# Altium PCB MK2.PcbDoc (part 2 of 7)
Units mil, origin at the board's own origin, x right, y up, seen from the top; angles counter-clockwise.
Board outline 3950 x 3965 mil, 2 copper layers (Top Layer, Bottom Layer); 19 components, 37 nets, 113 pads, 8 vias.
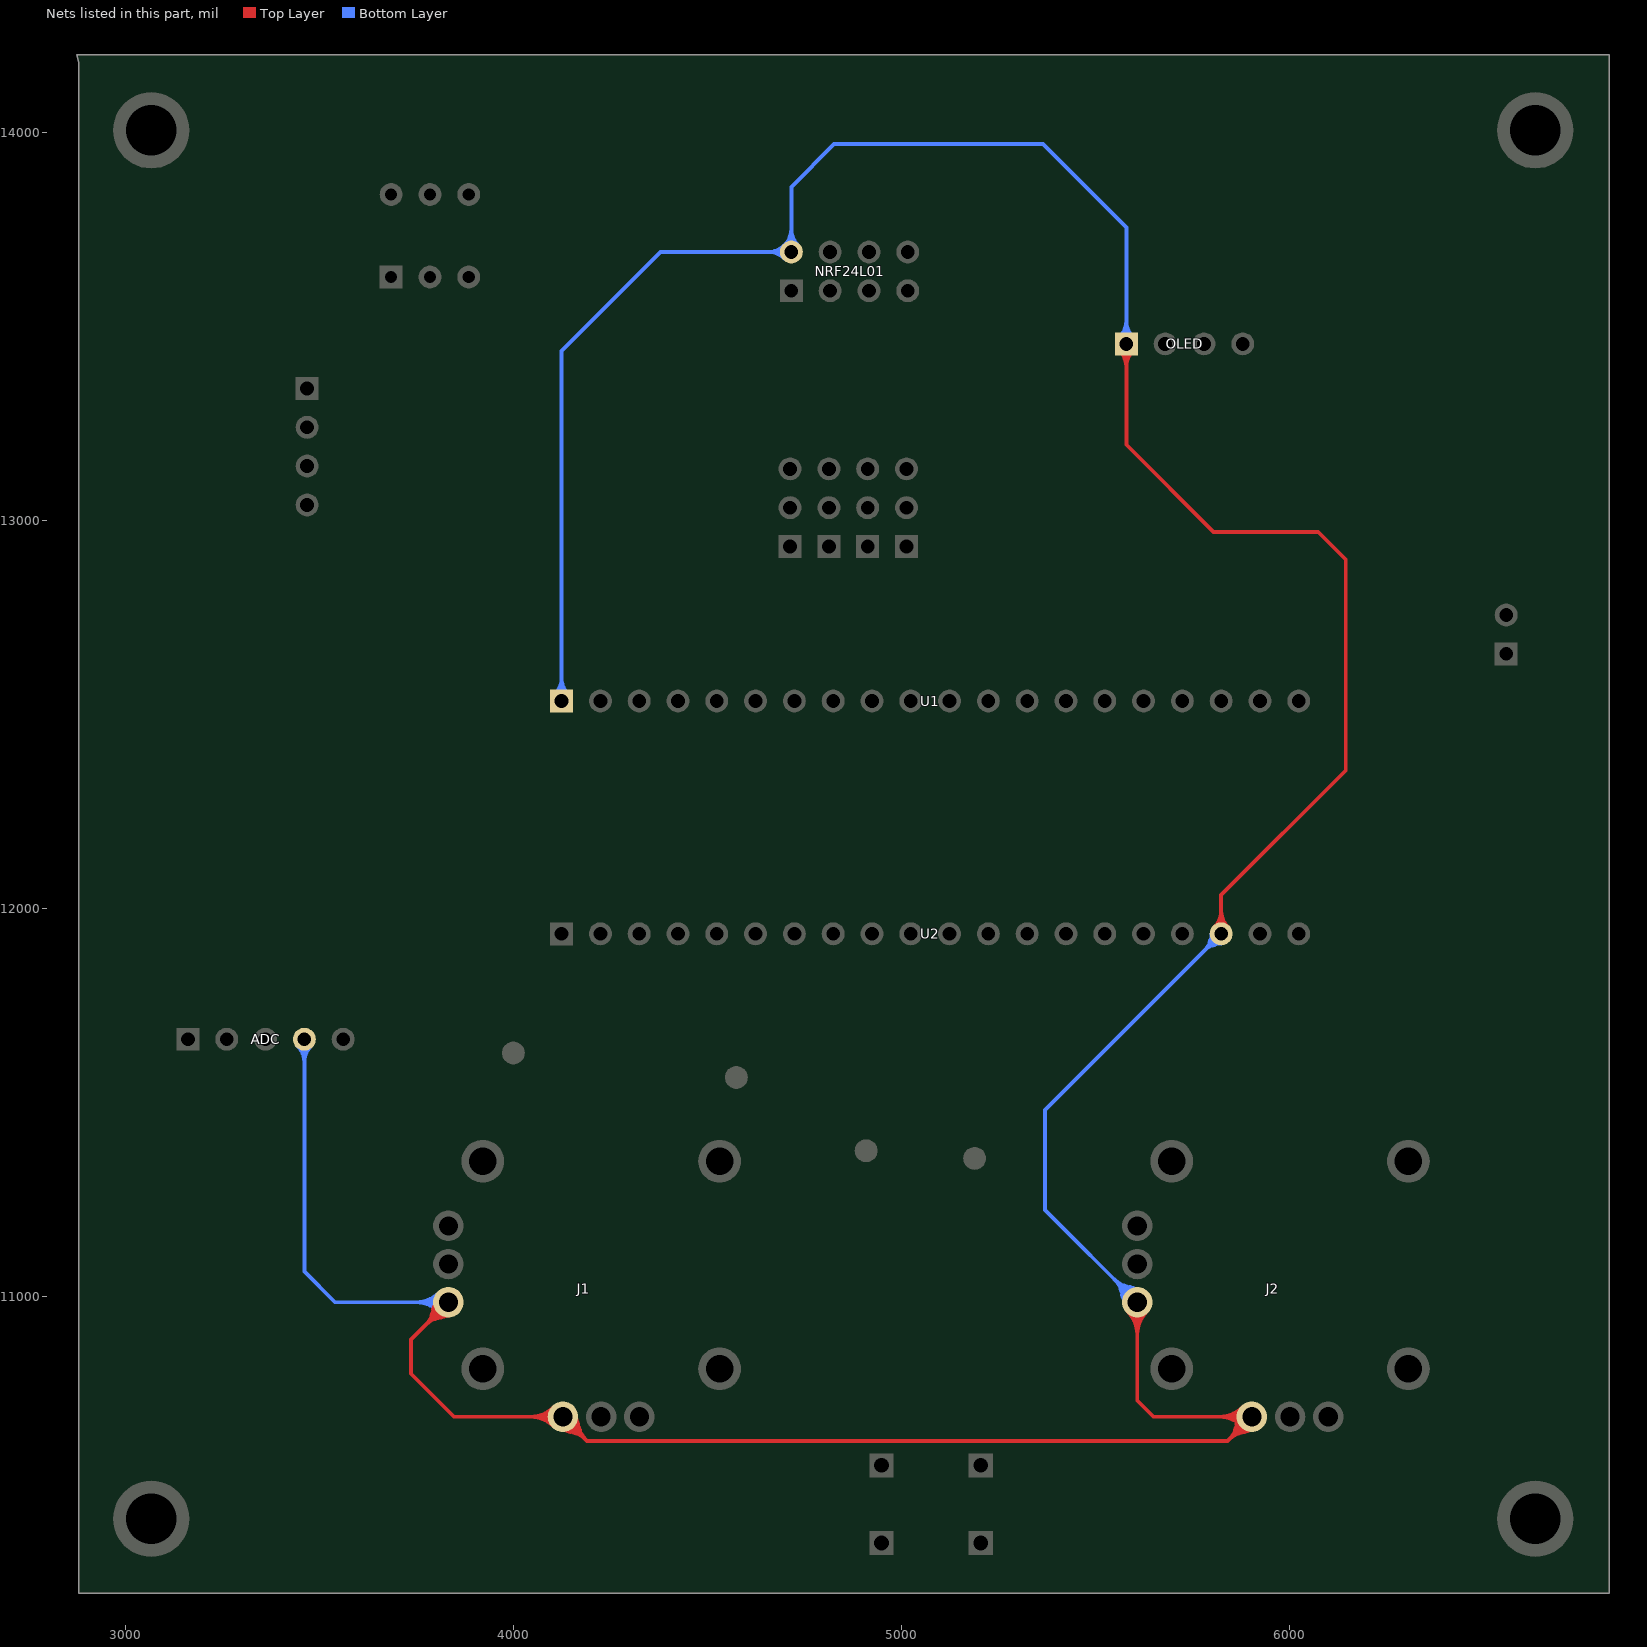
[diagram p2: the nets of this part, all layers, seen from the top]

## Via types
v1: diameter 50, hole 28, Top Layer to Bottom Layer, 8 vias

## Nets (pads, with @x,y where several pads share a name; then routed paths per layer and width w, separated by ;. In a path a pad name is that pad's centre, name@x,y a point inside that pad or via, vN(x,y) a via of type N, cw(c..) or ccw(c..) an arc to the next point about the centre after c; other vN are vias at no path point)
3.3V: ADC.4 J1.3 J1.4 J2.3 J2.4 NRF24L01.2 OLED.1 U1.1 U2.18 | length 45672.4
  Top Layer w10: J1.4@3832.68,10984.92 3736.26,10888.5 3736.26,10800.59 3847.2,10689.65 J1.3@4127.95,10689.65 4190.24,10627.36 5841.26,10627.36 J2.3@5903.54,10689.65 5650.35,10689.65 5608.27,10731.73 J2.4@5608.27,10984.92 ; OLED.1@5562.66,13437.66 cw(c5520.79,13395.79) 5580,13395.79 cw(c5639.21,13395.79) OLED.1@5597.34,13437.66 ; OLED.1@5569.73,13444.73 cw(c5544.93,13419.93) 5580,13419.93 cw(c5615.07,13419.93) OLED.1@5590.27,13444.73 ; OLED.1@5580,13455 5580,13195 5805,12970 6074.72,12970 6145.71,12899.02 6145.71,12355.71 5824.45,12034.45 U2.18@5824.45,11934.45 ; 3774,10926.25 cw(c3832.68,10867.57) J1.4@3832.68,10950.55 ; 3774,10926.25 ccw(c3715.33,10984.92) J1.4@3798.31,10984.92 ; 3774,10926.25 ccw(c3715.33,10984.92) J1.4@3798.31,10984.92 ; 3774,10926.25 cw(c3832.68,10867.57) J1.4@3832.68,10950.55 ; 3774,10926.25 ccw(c3715.33,10984.92) J1.4@3798.31,10984.92 ; 3774,10926.25 cw(c3832.68,10867.57) J1.4@3832.68,10950.55 ; 3774,10926.25 ccw(c3715.33,10984.92) J1.4@3798.31,10984.92 ; 3774,10926.25 cw(c3832.68,10867.57) J1.4@3832.68,10950.55 ; 3774,10926.25 ccw(c3715.33,10984.92) J1.4@3798.31,10984.92 ; 3774,10926.25 cw(c3832.68,10867.57) J1.4@3832.68,10950.55 ; 3774,10926.25 ccw(c3715.33,10984.92) J1.4@3798.31,10984.92 ; 3774,10926.25 cw(c3832.68,10867.57) J1.4@3832.68,10950.55 ; 3789.06,10950.42 cw(c3842.68,10936.05) J1.4@3831.55,10990.44 ; 3789.06,10950.42 cw(c3842.68,10936.05) J1.4@3831.55,10990.44 ; 3789.06,10950.42 cw(c3842.68,10936.05) J1.4@3831.55,10990.44 ; 3789.06,10950.42 cw(c3842.68,10936.05) J1.4@3831.55,10990.44 ; 3789.06,10950.42 cw(c3842.68,10936.05) J1.4@3831.55,10990.44 ; 3789.06,10950.42 cw(c3842.68,10936.05) J1.4@3831.55,10990.44 ; 3789.06,10950.42 cw(c3842.68,10936.05) J1.4@3831.55,10990.44 ; 3789.06,10950.42 cw(c3842.68,10936.05) J1.4@3831.55,10990.44 ; 3789.06,10950.42 cw(c3842.68,10936.05) J1.4@3831.55,10990.44 ; 3789.06,10950.42 cw(c3842.68,10936.05) J1.4@3831.55,10990.44 ; 3789.06,10950.42 cw(c3842.68,10936.05) J1.4@3831.55,10990.44 ; 3789.06,10950.42 cw(c3842.68,10936.05) J1.4@3831.55,10990.44 ; 3789.06,10950.42 cw(c3842.68,10936.05) J1.4@3831.55,10990.44 ; 3789.06,10950.42 cw(c3842.68,10936.05) J1.4@3831.55,10990.44 ; 3789.06,10950.42 cw(c3842.68,10936.05) J1.4@3831.55,10990.44 ; 3791.07,10943.32 cw(c3832.68,10901.72) J1.4@3832.68,10960.55 ; 3791.07,10943.32 ccw(c3749.47,10984.92) J1.4@3808.31,10984.92 ; 3791.07,10943.32 ccw(c3749.47,10984.92) J1.4@3808.31,10984.92 ; 3791.07,10943.32 cw(c3832.68,10901.72) J1.4@3832.68,10960.55 ; 3791.07,10943.32 ccw(c3749.47,10984.92) J1.4@3808.31,10984.92 ; 3791.07,10943.32 cw(c3832.68,10901.72) J1.4@3832.68,10960.55 ; 3791.07,10943.32 ccw(c3749.47,10984.92) J1.4@3808.31,10984.92 ; 3791.07,10943.32 cw(c3832.68,10901.72) J1.4@3832.68,10960.55 ; 3791.07,10943.32 ccw(c3749.47,10984.92) J1.4@3808.31,10984.92 ; 3791.07,10943.32 cw(c3832.68,10901.72) J1.4@3832.68,10960.55 ; 3791.07,10943.32 ccw(c3749.47,10984.92) J1.4@3808.31,10984.92 ; 3791.07,10943.32 cw(c3832.68,10901.72) J1.4@3832.68,10960.55 ; 3793.25,10966.05 cw(c3839.05,10953.78) J1.4@3829.54,11000.23 ; 3793.25,10966.05 cw(c3839.05,10953.78) J1.4@3829.54,11000.23 ; 3793.25,10966.05 cw(c3839.05,10953.78) J1.4@3829.54,11000.23 ; 3793.25,10966.05 cw(c3839.05,10953.78) J1.4@3829.54,11000.23 ; 3793.25,10966.05 cw(c3839.05,10953.78) J1.4@3829.54,11000.23 ; 3793.25,10966.05 cw(c3839.05,10953.78) J1.4@3829.54,11000.23 ; 3793.25,10966.05 cw(c3839.05,10953.78) J1.4@3829.54,11000.23 ; 3793.25,10966.05 cw(c3839.05,10953.78) J1.4@3829.54,11000.23 ; 3793.25,10966.05 cw(c3839.05,10953.78) J1.4@3829.54,11000.23 ; 3793.25,10966.05 cw(c3839.05,10953.78) J1.4@3829.54,11000.23 ; 3793.25,10966.05 cw(c3839.05,10953.78) J1.4@3829.54,11000.23 ; 3793.25,10966.05 cw(c3839.05,10953.78) J1.4@3829.54,11000.23 ; 3793.25,10966.05 cw(c3839.05,10953.78) J1.4@3829.54,11000.23 ; 3793.25,10966.05 cw(c3839.05,10953.78) J1.4@3829.54,11000.23 ; 3793.25,10966.05 cw(c3839.05,10953.78) J1.4@3829.54,11000.23 ; 3798.18,10941.31 ccw(c3783.81,10994.93) J1.4@3838.19,10983.79 ; 3798.18,10941.31 ccw(c3783.81,10994.93) J1.4@3838.19,10983.79 ; 3798.18,10941.31 ccw(c3783.81,10994.93) J1.4@3838.19,10983.79 ; 3798.18,10941.31 ccw(c3783.81,10994.93) J1.4@3838.19,10983.79 ; 3798.18,10941.31 ccw(c3783.81,10994.93) J1.4@3838.19,10983.79 ; 3798.18,10941.31 ccw(c3783.81,10994.93) J1.4@3838.19,10983.79 ; 3798.18,10941.31 ccw(c3783.81,10994.93) J1.4@3838.19,10983.79 ; 3798.18,10941.31 ccw(c3783.81,10994.93) J1.4@3838.19,10983.79 ; 3798.18,10941.31 ccw(c3783.81,10994.93) J1.4@3838.19,10983.79 ; 3798.18,10941.31 ccw(c3783.81,10994.93) J1.4@3838.19,10983.79 ; 3798.18,10941.31 ccw(c3783.81,10994.93) J1.4@3838.19,10983.79 ; 3798.18,10941.31 ccw(c3783.81,10994.93) J1.4@3838.19,10983.79 ; 3798.18,10941.31 ccw(c3783.81,10994.93) J1.4@3838.19,10983.79 ; 3798.18,10941.31 ccw(c3783.81,10994.93) J1.4@3838.19,10983.79 ; 3798.18,10941.31 ccw(c3783.81,10994.93) J1.4@3838.19,10983.79 ; 3800.27,10954.92 cw(c3833.69,10945.97) J1.4@3832.79,10980.55 ; 3800.27,10954.92 cw(c3833.69,10945.97) J1.4@3832.79,10980.55 ; 3800.27,10954.92 cw(c3833.69,10945.97) J1.4@3832.79,10980.55 ; 3800.27,10954.92 cw(c3833.69,10945.97) J1.4@3832.79,10980.55 ; 3800.27,10954.92 cw(c3833.69,10945.97) J1.4@3832.79,10980.55 ; 3800.27,10954.92 cw(c3833.69,10945.97) J1.4@3832.79,10980.55 ; 3800.27,10954.92 cw(c3833.69,10945.97) J1.4@3832.79,10980.55 ; 3800.27,10954.92 cw(c3833.69,10945.97) J1.4@3832.79,10980.55 ; 3800.27,10954.92 cw(c3833.69,10945.97) J1.4@3832.79,10980.55 ; 3800.27,10954.92 cw(c3833.69,10945.97) J1.4@3832.79,10980.55 ; 3800.27,10954.92 cw(c3833.69,10945.97) J1.4@3832.79,10980.55 ; 3800.27,10954.92 cw(c3833.69,10945.97) J1.4@3832.79,10980.55 ; 3800.27,10954.92 cw(c3833.69,10945.97) J1.4@3832.79,10980.55 ; 3800.27,10954.92 cw(c3833.69,10945.97) J1.4@3832.79,10980.55 ; 3800.27,10954.92 cw(c3833.69,10945.97) J1.4@3832.79,10980.55 ; 3802.68,10952.51 ccw(c3793.72,10985.93) J1.4@3828.31,10985.03 ; 3802.68,10952.51 ccw(c3793.72,10985.93) J1.4@3828.31,10985.03 ; 3802.68,10952.51 ccw(c3793.72,10985.93) J1.4@3828.31,10985.03 ; 3802.68,10952.51 ccw(c3793.72,10985.93) J1.4@3828.31,10985.03 ; 3802.68,10952.51 ccw(c3793.72,10985.93) J1.4@3828.31,10985.03 ; 3802.68,10952.51 ccw(c3793.72,10985.93) J1.4@3828.31,10985.03 ; 3802.68,10952.51 ccw(c3793.72,10985.93) J1.4@3828.31,10985.03 ; 3802.68,10952.51 ccw(c3793.72,10985.93) J1.4@3828.31,10985.03 ; 3802.68,10952.51 ccw(c3793.72,10985.93) J1.4@3828.31,10985.03 ; 3802.68,10952.51 ccw(c3793.72,10985.93) J1.4@3828.31,10985.03 ; 3802.68,10952.51 ccw(c3793.72,10985.93) J1.4@3828.31,10985.03 ; 3802.68,10952.51 ccw(c3793.72,10985.93) J1.4@3828.31,10985.03 ; 3802.68,10952.51 ccw(c3793.72,10985.93) J1.4@3828.31,10985.03 ; 3802.68,10952.51 ccw(c3793.72,10985.93) J1.4@3828.31,10985.03 ; 3802.68,10952.51 ccw(c3793.72,10985.93) J1.4@3828.31,10985.03 ; 3813.81,10945.49 ccw(c3801.53,10991.3) J1.4@3847.99,10981.79 ; 3813.81,10945.49 ccw(c3801.53,10991.3) J1.4@3847.99,10981.79 ; 3813.81,10945.49 ccw(c3801.53,10991.3) J1.4@3847.99,10981.79 ; 3813.81,10945.49 ccw(c3801.53,10991.3) J1.4@3847.99,10981.79 ; 3813.81,10945.49 ccw(c3801.53,10991.3) J1.4@3847.99,10981.79 ; 3813.81,10945.49 ccw(c3801.53,10991.3) J1.4@3847.99,10981.79 ; 3813.81,10945.49 ccw(c3801.53,10991.3) J1.4@3847.99,10981.79 ; 3813.81,10945.49 ccw(c3801.53,10991.3) J1.4@3847.99,10981.79 ; 3813.81,10945.49 ccw(c3801.53,10991.3) J1.4@3847.99,10981.79 ; 3813.81,10945.49 ccw(c3801.53,10991.3) J1.4@3847.99,10981.79 ; 3813.81,10945.49 ccw(c3801.53,10991.3) J1.4@3847.99,10981.79 ; 3813.81,10945.49 ccw(c3801.53,10991.3) J1.4@3847.99,10981.79 ; 3813.81,10945.49 ccw(c3801.53,10991.3) J1.4@3847.99,10981.79 ; 3813.81,10945.49 ccw(c3801.53,10991.3) J1.4@3847.99,10981.79 ; 3813.81,10945.49 ccw(c3801.53,10991.3) J1.4@3847.99,10981.79 ; 4044.98,10689.65 cw(c4044.98,10606.67) J1.3@4103.65,10665.34 ; 4044.98,10689.65 ccw(c4044.98,10772.62) J1.3@4103.65,10713.95 ; 4044.98,10689.65 ccw(c4044.98,10772.62) J1.3@4103.65,10713.95 ; 4044.98,10689.65 cw(c4044.98,10606.67) J1.3@4103.65,10665.34 ; 4044.98,10689.65 ccw(c4044.98,10772.62) J1.3@4103.65,10713.95 ; 4044.98,10689.65 cw(c4044.98,10606.67) J1.3@4103.65,10665.34 ; 4044.98,10689.65 ccw(c4044.98,10772.62) J1.3@4103.65,10713.95 ; 4044.98,10689.65 cw(c4044.98,10606.67) J1.3@4103.65,10665.34 ; 4044.98,10689.65 ccw(c4044.98,10772.62) J1.3@4103.65,10713.95 ; 4044.98,10689.65 cw(c4044.98,10606.67) J1.3@4103.65,10665.34 ; 4044.98,10689.65 ccw(c4044.98,10772.62) J1.3@4103.65,10713.95 ; 4044.98,10689.65 cw(c4044.98,10606.67) J1.3@4103.65,10665.34 ; 4069.12,10689.65 cw(c4069.12,10630.81) J1.3@4110.72,10672.41 ; 4069.12,10689.65 ccw(c4069.12,10748.48) J1.3@4110.72,10706.88 ; 4069.12,10689.65 ccw(c4069.12,10748.48) J1.3@4110.72,10706.88 ; 4069.12,10689.65 cw(c4069.12,10630.81) J1.3@4110.72,10672.41 ; 4069.12,10689.65 ccw(c4069.12,10748.48) J1.3@4110.72,10706.88 ; 4069.12,10689.65 cw(c4069.12,10630.81) J1.3@4110.72,10672.41 ; 4069.12,10689.65 ccw(c4069.12,10748.48) J1.3@4110.72,10706.88 ; 4069.12,10689.65 cw(c4069.12,10630.81) J1.3@4110.72,10672.41 ; 4069.12,10689.65 ccw(c4069.12,10748.48) J1.3@4110.72,10706.88 ; 4069.12,10689.65 cw(c4069.12,10630.81) J1.3@4110.72,10672.41 ; 4069.12,10689.65 ccw(c4069.12,10748.48) J1.3@4110.72,10706.88 ; 4069.12,10689.65 cw(c4069.12,10630.81) J1.3@4110.72,10672.41 ; J1.3@4112.64,10686.51 ccw(c4159.1,10696.02) 4146.82,10650.22 ; J1.3@4112.64,10686.51 ccw(c4159.1,10696.02) 4146.82,10650.22 ; J1.3@4112.64,10686.51 ccw(c4159.1,10696.02) 4146.82,10650.22 ; J1.3@4112.64,10686.51 ccw(c4159.1,10696.02) 4146.82,10650.22 ; J1.3@4112.64,10686.51 ccw(c4159.1,10696.02) 4146.82,10650.22 ; J1.3@4112.64,10686.51 ccw(c4159.1,10696.02) 4146.82,10650.22 ; J1.3@4112.64,10686.51 ccw(c4159.1,10696.02) 4146.82,10650.22 ; J1.3@4112.64,10686.51 ccw(c4159.1,10696.02) 4146.82,10650.22 ; J1.3@4112.64,10686.51 ccw(c4159.1,10696.02) 4146.82,10650.22 ; J1.3@4112.64,10686.51 ccw(c4159.1,10696.02) 4146.82,10650.22 ; J1.3@4112.64,10686.51 ccw(c4159.1,10696.02) 4146.82,10650.22 ; J1.3@4112.64,10686.51 ccw(c4159.1,10696.02) 4146.82,10650.22 ; J1.3@4112.64,10686.51 ccw(c4159.1,10696.02) 4146.82,10650.22 ; J1.3@4112.64,10686.51 ccw(c4159.1,10696.02) 4146.82,10650.22 ; J1.3@4112.64,10686.51 ccw(c4159.1,10696.02) 4146.82,10650.22 ; J1.3@4122.44,10688.52 ccw(c4176.82,10699.65) 4162.45,10646.03 ; J1.3@4122.44,10688.52 ccw(c4176.82,10699.65) 4162.45,10646.03 ; J1.3@4122.44,10688.52 ccw(c4176.82,10699.65) 4162.45,10646.03 ; J1.3@4122.44,10688.52 ccw(c4176.82,10699.65) 4162.45,10646.03 ; J1.3@4122.44,10688.52 ccw(c4176.82,10699.65) 4162.45,10646.03 ; J1.3@4122.44,10688.52 ccw(c4176.82,10699.65) 4162.45,10646.03 ; J1.3@4122.44,10688.52 ccw(c4176.82,10699.65) 4162.45,10646.03 ; J1.3@4122.44,10688.52 ccw(c4176.82,10699.65) 4162.45,10646.03 ; J1.3@4122.44,10688.52 ccw(c4176.82,10699.65) 4162.45,10646.03 ; J1.3@4122.44,10688.52 ccw(c4176.82,10699.65) 4162.45,10646.03 ; J1.3@4122.44,10688.52 ccw(c4176.82,10699.65) 4162.45,10646.03 ; J1.3@4122.44,10688.52 ccw(c4176.82,10699.65) 4162.45,10646.03 ; J1.3@4122.44,10688.52 ccw(c4176.82,10699.65) 4162.45,10646.03 ; J1.3@4122.44,10688.52 ccw(c4176.82,10699.65) 4162.45,10646.03 ; J1.3@4122.44,10688.52 ccw(c4176.82,10699.65) 4162.45,10646.03 ; J1.3@4127.84,10685.28 cw(c4126.94,10650.69) 4160.36,10659.64 ; J1.3@4127.84,10685.28 cw(c4126.94,10650.69) 4160.36,10659.64 ; J1.3@4127.84,10685.28 cw(c4126.94,10650.69) 4160.36,10659.64 ; J1.3@4127.84,10685.28 cw(c4126.94,10650.69) 4160.36,10659.64 ; J1.3@4127.84,10685.28 cw(c4126.94,10650.69) 4160.36,10659.64 ; J1.3@4127.84,10685.28 cw(c4126.94,10650.69) 4160.36,10659.64 ; J1.3@4127.84,10685.28 cw(c4126.94,10650.69) 4160.36,10659.64 ; J1.3@4127.84,10685.28 cw(c4126.94,10650.69) 4160.36,10659.64 ; J1.3@4127.84,10685.28 cw(c4126.94,10650.69) 4160.36,10659.64 ; J1.3@4127.84,10685.28 cw(c4126.94,10650.69) 4160.36,10659.64 ; J1.3@4127.84,10685.28 cw(c4126.94,10650.69) 4160.36,10659.64 ; J1.3@4127.84,10685.28 cw(c4126.94,10650.69) 4160.36,10659.64 ; J1.3@4127.84,10685.28 cw(c4126.94,10650.69) 4160.36,10659.64 ; J1.3@4127.84,10685.28 cw(c4126.94,10650.69) 4160.36,10659.64 ; J1.3@4127.84,10685.28 cw(c4126.94,10650.69) 4160.36,10659.64 ; J1.3@4127.95,10655.28 cw(c4127.95,10572.3) 4186.63,10630.97 ; J1.3@4127.95,10655.28 cw(c4127.95,10572.3) 4186.63,10630.97 ; J1.3@4127.95,10655.28 cw(c4127.95,10572.3) 4186.63,10630.97 ; J1.3@4127.95,10655.28 cw(c4127.95,10572.3) 4186.63,10630.97 ; J1.3@4127.95,10655.28 cw(c4127.95,10572.3) 4186.63,10630.97 ; J1.3@4127.95,10655.28 cw(c4127.95,10572.3) 4186.63,10630.97 ; J1.3@4127.95,10665.28 cw(c4127.95,10606.44) 4169.56,10648.04 ; J1.3@4127.95,10665.28 cw(c4127.95,10606.44) 4169.56,10648.04 ; J1.3@4127.95,10665.28 cw(c4127.95,10606.44) 4169.56,10648.04 ; J1.3@4127.95,10665.28 cw(c4127.95,10606.44) 4169.56,10648.04 ; J1.3@4127.95,10665.28 cw(c4127.95,10606.44) 4169.56,10648.04 ; J1.3@4127.95,10665.28 cw(c4127.95,10606.44) 4169.56,10648.04 ; J1.3@4129.08,10695.16 cw(c4117.95,10640.78) 4171.57,10655.14 ; J1.3@4129.08,10695.16 cw(c4117.95,10640.78) 4171.57,10655.14 ; J1.3@4129.08,10695.16 cw(c4117.95,10640.78) 4171.57,10655.14 ; J1.3@4129.08,10695.16 cw(c4117.95,10640.78) 4171.57,10655.14 ; J1.3@4129.08,10695.16 cw(c4117.95,10640.78) 4171.57,10655.14 ; J1.3@4129.08,10695.16 cw(c4117.95,10640.78) 4171.57,10655.14 ; J1.3@4129.08,10695.16 cw(c4117.95,10640.78) 4171.57,10655.14 ; J1.3@4129.08,10695.16 cw(c4117.95,10640.78) 4171.57,10655.14 ; J1.3@4129.08,10695.16 cw(c4117.95,10640.78) 4171.57,10655.14 ; J1.3@4129.08,10695.16 cw(c4117.95,10640.78) 4171.57,10655.14 ; J1.3@4129.08,10695.16 cw(c4117.95,10640.78) 4171.57,10655.14 ; J1.3@4129.08,10695.16 cw(c4117.95,10640.78) 4171.57,10655.14 ; J1.3@4129.08,10695.16 cw(c4117.95,10640.78) 4171.57,10655.14 ; J1.3@4129.08,10695.16 cw(c4117.95,10640.78) 4171.57,10655.14 ; J1.3@4129.08,10695.16 cw(c4117.95,10640.78) 4171.57,10655.14 ; J1.3@4131.09,10704.96 cw(c4121.58,10658.5) 4167.38,10670.78 ; J1.3@4131.09,10704.96 cw(c4121.58,10658.5) 4167.38,10670.78 ; J1.3@4131.09,10704.96 cw(c4121.58,10658.5) 4167.38,10670.78 ; J1.3@4131.09,10704.96 cw(c4121.58,10658.5) 4167.38,10670.78 ; J1.3@4131.09,10704.96 cw(c4121.58,10658.5) 4167.38,10670.78 ; J1.3@4131.09,10704.96 cw(c4121.58,10658.5) 4167.38,10670.78 ; J1.3@4131.09,10704.96 cw(c4121.58,10658.5) 4167.38,10670.78 ; J1.3@4131.09,10704.96 cw(c4121.58,10658.5) 4167.38,10670.78 ; J1.3@4131.09,10704.96 cw(c4121.58,10658.5) 4167.38,10670.78 ; J1.3@4131.09,10704.96 cw(c4121.58,10658.5) 4167.38,10670.78 ; J1.3@4131.09,10704.96 cw(c4121.58,10658.5) 4167.38,10670.78 ; J1.3@4131.09,10704.96 cw(c4121.58,10658.5) 4167.38,10670.78 ; J1.3@4131.09,10704.96 cw(c4121.58,10658.5) 4167.38,10670.78 ; J1.3@4131.09,10704.96 cw(c4121.58,10658.5) 4167.38,10670.78 ; J1.3@4131.09,10704.96 cw(c4121.58,10658.5) 4167.38,10670.78 ; J1.3@4132.32,10689.76 ccw(c4166.91,10690.66) 4157.95,10657.24 ; J1.3@4132.32,10689.76 ccw(c4166.91,10690.66) 4157.95,10657.24 ; J1.3@4132.32,10689.76 ccw(c4166.91,10690.66) 4157.95,10657.24 ; J1.3@4132.32,10689.76 ccw(c4166.91,10690.66) 4157.95,10657.24 ; J1.3@4132.32,10689.76 ccw(c4166.91,10690.66) 4157.95,10657.24 ; J1.3@4132.32,10689.76 ccw(c4166.91,10690.66) 4157.95,10657.24 ; J1.3@4132.32,10689.76 ccw(c4166.91,10690.66) 4157.95,10657.24 ; J1.3@4132.32,10689.76 ccw(c4166.91,10690.66) 4157.95,10657.24 ; J1.3@4132.32,10689.76 ccw(c4166.91,10690.66) 4157.95,10657.24 ; J1.3@4132.32,10689.76 ccw(c4166.91,10690.66) 4157.95,10657.24 ; J1.3@4132.32,10689.76 ccw(c4166.91,10690.66) 4157.95,10657.24 ; J1.3@4132.32,10689.76 ccw(c4166.91,10690.66) 4157.95,10657.24 ; J1.3@4132.32,10689.76 ccw(c4166.91,10690.66) 4157.95,10657.24 ; J1.3@4132.32,10689.76 ccw(c4166.91,10690.66) 4157.95,10657.24 ; J1.3@4132.32,10689.76 ccw(c4166.91,10690.66) 4157.95,10657.24 ; J1.3@4152.32,10689.65 ccw(c4211.16,10689.65) 4169.56,10648.04 ; J1.3@4152.32,10689.65 ccw(c4211.16,10689.65) 4169.56,10648.04 ; J1.3@4152.32,10689.65 ccw(c4211.16,10689.65) 4169.56,10648.04 ; J1.3@4152.32,10689.65 ccw(c4211.16,10689.65) 4169.56,10648.04 ; J1.3@4152.32,10689.65 ccw(c4211.16,10689.65) 4169.56,10648.04 ; J1.3@4152.32,10689.65 ccw(c4211.16,10689.65) 4169.56,10648.04 ; J1.3@4162.32,10689.65 ccw(c4245.3,10689.65) 4186.63,10630.97 ; J1.3@4162.32,10689.65 ccw(c4245.3,10689.65) 4186.63,10630.97 ; J1.3@4162.32,10689.65 ccw(c4245.3,10689.65) 4186.63,10630.97 ; J1.3@4162.32,10689.65 ccw(c4245.3,10689.65) 4186.63,10630.97 ; J1.3@4162.32,10689.65 ccw(c4245.3,10689.65) 4186.63,10630.97 ; J1.3@4162.32,10689.65 ccw(c4245.3,10689.65) 4186.63,10630.97 ; J2.4@5583.96,10960.62 cw(c5525.29,10901.94) 5608.27,10901.94 ; J2.4@5583.96,10960.62 cw(c5525.29,10901.94) 5608.27,10901.94 ; J2.4@5583.96,10960.62 cw(c5525.29,10901.94) 5608.27,10901.94 ; J2.4@5583.96,10960.62 cw(c5525.29,10901.94) 5608.27,10901.94 ; J2.4@5583.96,10960.62 cw(c5525.29,10901.94) 5608.27,10901.94 ; J2.4@5583.96,10960.62 cw(c5525.29,10901.94) 5608.27,10901.94 ; J2.4@5591.04,10967.69 cw(c5549.43,10926.09) 5608.27,10926.09 ; J2.4@5591.04,10967.69 cw(c5549.43,10926.09) 5608.27,10926.09 ; J2.4@5591.04,10967.69 cw(c5549.43,10926.09) 5608.27,10926.09 ; J2.4@5591.04,10967.69 cw(c5549.43,10926.09) 5608.27,10926.09 ; J2.4@5591.04,10967.69 cw(c5549.43,10926.09) 5608.27,10926.09 ; J2.4@5591.04,10967.69 cw(c5549.43,10926.09) 5608.27,10926.09 ; 5608.27,10901.94 cw(c5691.24,10901.94) J2.4@5632.57,10960.62 ; 5608.27,10901.94 cw(c5691.24,10901.94) J2.4@5632.57,10960.62 ; 5608.27,10901.94 cw(c5691.24,10901.94) J2.4@5632.57,10960.62 ; 5608.27,10901.94 cw(c5691.24,10901.94) J2.4@5632.57,10960.62 ; 5608.27,10901.94 cw(c5691.24,10901.94) J2.4@5632.57,10960.62 ; 5608.27,10901.94 cw(c5691.24,10901.94) J2.4@5632.57,10960.62 ; 5608.27,10926.09 cw(c5667.1,10926.09) J2.4@5625.5,10967.69 ; 5608.27,10926.09 cw(c5667.1,10926.09) J2.4@5625.5,10967.69 ; 5608.27,10926.09 cw(c5667.1,10926.09) J2.4@5625.5,10967.69 ; 5608.27,10926.09 cw(c5667.1,10926.09) J2.4@5625.5,10967.69 ; 5608.27,10926.09 cw(c5667.1,10926.09) J2.4@5625.5,10967.69 ; 5608.27,10926.09 cw(c5667.1,10926.09) J2.4@5625.5,10967.69 ; U2.18@5807.11,11951.79 ccw(c5765.23,11993.66) 5824.45,11993.66 ; U2.18@5807.11,11951.79 ccw(c5765.23,11993.66) 5824.45,11993.66 ; U2.18@5807.11,11951.79 ccw(c5765.23,11993.66) 5824.45,11993.66 ; U2.18@5807.11,11951.79 ccw(c5765.23,11993.66) 5824.45,11993.66 ; U2.18@5807.11,11951.79 ccw(c5765.23,11993.66) 5824.45,11993.66 ; U2.18@5807.11,11951.79 ccw(c5765.23,11993.66) 5824.45,11993.66 ; U2.18@5814.18,11944.72 ccw(c5789.38,11969.52) 5824.45,11969.52 ; U2.18@5814.18,11944.72 ccw(c5789.38,11969.52) 5824.45,11969.52 ; U2.18@5814.18,11944.72 ccw(c5789.38,11969.52) 5824.45,11969.52 ; U2.18@5814.18,11944.72 ccw(c5789.38,11969.52) 5824.45,11969.52 ; U2.18@5814.18,11944.72 ccw(c5789.38,11969.52) 5824.45,11969.52 ; U2.18@5814.18,11944.72 ccw(c5789.38,11969.52) 5824.45,11969.52 ; 5820.57,10689.65 cw(c5820.57,10606.67) J2.3@5879.24,10665.34 ; 5820.57,10689.65 ccw(c5820.57,10772.62) J2.3@5879.24,10713.95 ; 5820.57,10689.65 ccw(c5820.57,10772.62) J2.3@5879.24,10713.95 ; 5820.57,10689.65 cw(c5820.57,10606.67) J2.3@5879.24,10665.34 ; 5820.57,10689.65 ccw(c5820.57,10772.62) J2.3@5879.24,10713.95 ; 5820.57,10689.65 cw(c5820.57,10606.67) J2.3@5879.24,10665.34 ; 5820.57,10689.65 ccw(c5820.57,10772.62) J2.3@5879.24,10713.95 ; 5820.57,10689.65 cw(c5820.57,10606.67) J2.3@5879.24,10665.34 ; 5820.57,10689.65 ccw(c5820.57,10772.62) J2.3@5879.24,10713.95 ; 5820.57,10689.65 cw(c5820.57,10606.67) J2.3@5879.24,10665.34 ; 5820.57,10689.65 ccw(c5820.57,10772.62) J2.3@5879.24,10713.95 ; 5820.57,10689.65 cw(c5820.57,10606.67) J2.3@5879.24,10665.34 ; 5824.45,11969.52 ccw(c5859.52,11969.52) U2.18@5834.72,11944.72 ; 5824.45,11969.52 ccw(c5859.52,11969.52) U2.18@5834.72,11944.72 ; 5824.45,11969.52 ccw(c5859.52,11969.52) U2.18@5834.72,11944.72 ; 5824.45,11969.52 ccw(c5859.52,11969.52) U2.18@5834.72,11944.72 ; 5824.45,11969.52 ccw(c5859.52,11969.52) U2.18@5834.72,11944.72 ; 5824.45,11969.52 ccw(c5859.52,11969.52) U2.18@5834.72,11944.72 ; 5824.45,11993.66 ccw(c5883.66,11993.66) U2.18@5841.79,11951.79 ; 5824.45,11993.66 ccw(c5883.66,11993.66) U2.18@5841.79,11951.79 ; 5824.45,11993.66 ccw(c5883.66,11993.66) U2.18@5841.79,11951.79 ; 5824.45,11993.66 ccw(c5883.66,11993.66) U2.18@5841.79,11951.79 ; 5824.45,11993.66 ccw(c5883.66,11993.66) U2.18@5841.79,11951.79 ; 5824.45,11993.66 ccw(c5883.66,11993.66) U2.18@5841.79,11951.79 ; 5844.71,10689.65 cw(c5844.71,10630.81) J2.3@5886.31,10672.41 ; 5844.71,10689.65 ccw(c5844.71,10748.48) J2.3@5886.31,10706.88 ; 5844.71,10689.65 ccw(c5844.71,10748.48) J2.3@5886.31,10706.88 ; 5844.71,10689.65 cw(c5844.71,10630.81) J2.3@5886.31,10672.41 ; 5844.71,10689.65 ccw(c5844.71,10748.48) J2.3@5886.31,10706.88 ; 5844.71,10689.65 cw(c5844.71,10630.81) J2.3@5886.31,10672.41 ; 5844.71,10689.65 ccw(c5844.71,10748.48) J2.3@5886.31,10706.88 ; 5844.71,10689.65 cw(c5844.71,10630.81) J2.3@5886.31,10672.41 ; 5844.71,10689.65 ccw(c5844.71,10748.48) J2.3@5886.31,10706.88 ; 5844.71,10689.65 cw(c5844.71,10630.81) J2.3@5886.31,10672.41 ; 5844.71,10689.65 ccw(c5844.71,10748.48) J2.3@5886.31,10706.88 ; 5844.71,10689.65 cw(c5844.71,10630.81) J2.3@5886.31,10672.41 ; 5844.87,10630.97 cw(c5903.54,10572.3) J2.3@5903.54,10655.28 ; 5844.87,10630.97 ccw(c5786.2,10689.65) J2.3@5869.17,10689.65 ; 5844.87,10630.97 ccw(c5786.2,10689.65) J2.3@5869.17,10689.65 ; 5844.87,10630.97 cw(c5903.54,10572.3) J2.3@5903.54,10655.28 ; 5844.87,10630.97 ccw(c5786.2,10689.65) J2.3@5869.17,10689.65 ; 5844.87,10630.97 cw(c5903.54,10572.3) J2.3@5903.54,10655.28 ; 5844.87,10630.97 ccw(c5786.2,10689.65) J2.3@5869.17,10689.65 ; 5844.87,10630.97 cw(c5903.54,10572.3) J2.3@5903.54,10655.28 ; 5844.87,10630.97 ccw(c5786.2,10689.65) J2.3@5869.17,10689.65 ; 5844.87,10630.97 cw(c5903.54,10572.3) J2.3@5903.54,10655.28 ; 5844.87,10630.97 ccw(c5786.2,10689.65) J2.3@5869.17,10689.65 ; 5844.87,10630.97 cw(c5903.54,10572.3) J2.3@5903.54,10655.28 ; 5859.93,10655.14 cw(c5913.55,10640.78) J2.3@5902.41,10695.16 ; 5859.93,10655.14 cw(c5913.55,10640.78) J2.3@5902.41,10695.16 ; 5859.93,10655.14 cw(c5913.55,10640.78) J2.3@5902.41,10695.16 ; 5859.93,10655.14 cw(c5913.55,10640.78) J2.3@5902.41,10695.16 ; 5859.93,10655.14 cw(c5913.55,10640.78) J2.3@5902.41,10695.16 ; 5859.93,10655.14 cw(c5913.55,10640.78) J2.3@5902.41,10695.16 ; 5859.93,10655.14 cw(c5913.55,10640.78) J2.3@5902.41,10695.16 ; 5859.93,10655.14 cw(c5913.55,10640.78) J2.3@5902.41,10695.16 ; 5859.93,10655.14 cw(c5913.55,10640.78) J2.3@5902.41,10695.16 ; 5859.93,10655.14 cw(c5913.55,10640.78) J2.3@5902.41,10695.16 ; 5859.93,10655.14 cw(c5913.55,10640.78) J2.3@5902.41,10695.16 ; 5859.93,10655.14 cw(c5913.55,10640.78) J2.3@5902.41,10695.16 ; 5859.93,10655.14 cw(c5913.55,10640.78) J2.3@5902.41,10695.16 ; 5859.93,10655.14 cw(c5913.55,10640.78) J2.3@5902.41,10695.16 ; 5859.93,10655.14 cw(c5913.55,10640.78) J2.3@5902.41,10695.16 ; 5861.94,10648.04 cw(c5903.54,10606.44) J2.3@5903.54,10665.28 ; 5861.94,10648.04 ccw(c5820.34,10689.65) J2.3@5879.17,10689.65 ; 5861.94,10648.04 ccw(c5820.34,10689.65) J2.3@5879.17,10689.65 ; 5861.94,10648.04 cw(c5903.54,10606.44) J2.3@5903.54,10665.28 ; 5861.94,10648.04 ccw(c5820.34,10689.65) J2.3@5879.17,10689.65 ; 5861.94,10648.04 cw(c5903.54,10606.44) J2.3@5903.54,10665.28 ; 5861.94,10648.04 ccw(c5820.34,10689.65) J2.3@5879.17,10689.65 ; 5861.94,10648.04 cw(c5903.54,10606.44) J2.3@5903.54,10665.28 ; 5861.94,10648.04 ccw(c5820.34,10689.65) J2.3@5879.17,10689.65 ; 5861.94,10648.04 cw(c5903.54,10606.44) J2.3@5903.54,10665.28 ; 5861.94,10648.04 ccw(c5820.34,10689.65) J2.3@5879.17,10689.65 ; 5861.94,10648.04 cw(c5903.54,10606.44) J2.3@5903.54,10665.28 ; 5864.12,10670.78 cw(c5909.92,10658.5) J2.3@5900.41,10704.96 ; 5864.12,10670.78 cw(c5909.92,10658.5) J2.3@5900.41,10704.96 ; 5864.12,10670.78 cw(c5909.92,10658.5) J2.3@5900.41,10704.96 ; 5864.12,10670.78 cw(c5909.92,10658.5) J2.3@5900.41,10704.96 ; 5864.12,10670.78 cw(c5909.92,10658.5) J2.3@5900.41,10704.96 ; 5864.12,10670.78 cw(c5909.92,10658.5) J2.3@5900.41,10704.96 ; 5864.12,10670.78 cw(c5909.92,10658.5) J2.3@5900.41,10704.96 ; 5864.12,10670.78 cw(c5909.92,10658.5) J2.3@5900.41,10704.96 ; 5864.12,10670.78 cw(c5909.92,10658.5) J2.3@5900.41,10704.96 ; 5864.12,10670.78 cw(c5909.92,10658.5) J2.3@5900.41,10704.96 ; 5864.12,10670.78 cw(c5909.92,10658.5) J2.3@5900.41,10704.96 ; 5864.12,10670.78 cw(c5909.92,10658.5) J2.3@5900.41,10704.96 ; 5864.12,10670.78 cw(c5909.92,10658.5) J2.3@5900.41,10704.96 ; 5864.12,10670.78 cw(c5909.92,10658.5) J2.3@5900.41,10704.96 ; 5864.12,10670.78 cw(c5909.92,10658.5) J2.3@5900.41,10704.96 ; 5869.04,10646.03 ccw(c5854.67,10699.65) J2.3@5909.06,10688.52 ; 5869.04,10646.03 ccw(c5854.67,10699.65) J2.3@5909.06,10688.52 ; 5869.04,10646.03 ccw(c5854.67,10699.65) J2.3@5909.06,10688.52 ; 5869.04,10646.03 ccw(c5854.67,10699.65) J2.3@5909.06,10688.52 ; 5869.04,10646.03 ccw(c5854.67,10699.65) J2.3@5909.06,10688.52 ; 5869.04,10646.03 ccw(c5854.67,10699.65) J2.3@5909.06,10688.52 ; 5869.04,10646.03 ccw(c5854.67,10699.65) J2.3@5909.06,10688.52 ; 5869.04,10646.03 ccw(c5854.67,10699.65) J2.3@5909.06,10688.52 ; 5869.04,10646.03 ccw(c5854.67,10699.65) J2.3@5909.06,10688.52 ; 5869.04,10646.03 ccw(c5854.67,10699.65) J2.3@5909.06,10688.52 ; 5869.04,10646.03 ccw(c5854.67,10699.65) J2.3@5909.06,10688.52 ; 5869.04,10646.03 ccw(c5854.67,10699.65) J2.3@5909.06,10688.52 ; 5869.04,10646.03 ccw(c5854.67,10699.65) J2.3@5909.06,10688.52 ; 5869.04,10646.03 ccw(c5854.67,10699.65) J2.3@5909.06,10688.52 ; 5869.04,10646.03 ccw(c5854.67,10699.65) J2.3@5909.06,10688.52 ; 5871.13,10659.64 cw(c5904.55,10650.69) J2.3@5903.66,10685.28 ; 5871.13,10659.64 cw(c5904.55,10650.69) J2.3@5903.66,10685.28 ; 5871.13,10659.64 cw(c5904.55,10650.69) J2.3@5903.66,10685.28 ; 5871.13,10659.64 cw(c5904.55,10650.69) J2.3@5903.66,10685.28 ; 5871.13,10659.64 cw(c5904.55,10650.69) J2.3@5903.66,10685.28 ; 5871.13,10659.64 cw(c5904.55,10650.69) J2.3@5903.66,10685.28 ; 5871.13,10659.64 cw(c5904.55,10650.69) J2.3@5903.66,10685.28 ; 5871.13,10659.64 cw(c5904.55,10650.69) J2.3@5903.66,10685.28 ; 5871.13,10659.64 cw(c5904.55,10650.69) J2.3@5903.66,10685.28 ; 5871.13,10659.64 cw(c5904.55,10650.69) J2.3@5903.66,10685.28 ; 5871.13,10659.64 cw(c5904.55,10650.69) J2.3@5903.66,10685.28 ; 5871.13,10659.64 cw(c5904.55,10650.69) J2.3@5903.66,10685.28 ; 5871.13,10659.64 cw(c5904.55,10650.69) J2.3@5903.66,10685.28 ; 5871.13,10659.64 cw(c5904.55,10650.69) J2.3@5903.66,10685.28 ; 5871.13,10659.64 cw(c5904.55,10650.69) J2.3@5903.66,10685.28 ; 5873.54,10657.24 ccw(c5864.59,10690.66) J2.3@5899.17,10689.76 ; 5873.54,10657.24 ccw(c5864.59,10690.66) J2.3@5899.17,10689.76 ; 5873.54,10657.24 ccw(c5864.59,10690.66) J2.3@5899.17,10689.76 ; 5873.54,10657.24 ccw(c5864.59,10690.66) J2.3@5899.17,10689.76 ; 5873.54,10657.24 ccw(c5864.59,10690.66) J2.3@5899.17,10689.76 ; 5873.54,10657.24 ccw(c5864.59,10690.66) J2.3@5899.17,10689.76 ; 5873.54,10657.24 ccw(c5864.59,10690.66) J2.3@5899.17,10689.76 ; 5873.54,10657.24 ccw(c5864.59,10690.66) J2.3@5899.17,10689.76 ; 5873.54,10657.24 ccw(c5864.59,10690.66) J2.3@5899.17,10689.76 ; 5873.54,10657.24 ccw(c5864.59,10690.66) J2.3@5899.17,10689.76 ; 5873.54,10657.24 ccw(c5864.59,10690.66) J2.3@5899.17,10689.76 ; 5873.54,10657.24 ccw(c5864.59,10690.66) J2.3@5899.17,10689.76 ; 5873.54,10657.24 ccw(c5864.59,10690.66) J2.3@5899.17,10689.76 ; 5873.54,10657.24 ccw(c5864.59,10690.66) J2.3@5899.17,10689.76 ; 5873.54,10657.24 ccw(c5864.59,10690.66) J2.3@5899.17,10689.76 ; 5884.67,10650.22 ccw(c5872.4,10696.02) J2.3@5918.86,10686.51 ; 5884.67,10650.22 ccw(c5872.4,10696.02) J2.3@5918.86,10686.51 ; 5884.67,10650.22 ccw(c5872.4,10696.02) J2.3@5918.86,10686.51 ; 5884.67,10650.22 ccw(c5872.4,10696.02) J2.3@5918.86,10686.51 ; 5884.67,10650.22 ccw(c5872.4,10696.02) J2.3@5918.86,10686.51 ; 5884.67,10650.22 ccw(c5872.4,10696.02) J2.3@5918.86,10686.51 ; 5884.67,10650.22 ccw(c5872.4,10696.02) J2.3@5918.86,10686.51 ; 5884.67,10650.22 ccw(c5872.4,10696.02) J2.3@5918.86,10686.51 ; 5884.67,10650.22 ccw(c5872.4,10696.02) J2.3@5918.86,10686.51 ; 5884.67,10650.22 ccw(c5872.4,10696.02) J2.3@5918.86,10686.51 ; 5884.67,10650.22 ccw(c5872.4,10696.02) J2.3@5918.86,10686.51 ; 5884.67,10650.22 ccw(c5872.4,10696.02) J2.3@5918.86,10686.51 ; 5884.67,10650.22 ccw(c5872.4,10696.02) J2.3@5918.86,10686.51 ; 5884.67,10650.22 ccw(c5872.4,10696.02) J2.3@5918.86,10686.51 ; 5884.67,10650.22 ccw(c5872.4,10696.02) J2.3@5918.86,10686.51
  Bottom Layer w10: ADC.4@3461.46,11662.8 3461.46,11063.58 3540.12,10984.92 J1.4@3832.68,10984.92 ; U1.1@4124.45,12534.45 4124.45,13436.81 4379.57,13691.93 NRF24L01.2@4716.57,13691.93 4716.57,13859.65 4826.81,13969.88 5365.12,13969.88 5580,13755 OLED.1@5580,13455 ; OLED.1@5562.66,13472.34 ccw(c5520.79,13514.21) 5580,13514.21 ccw(c5639.21,13514.21) OLED.1@5597.34,13472.34 ; OLED.1@5569.73,13465.27 ccw(c5544.93,13490.07) 5580,13490.07 ccw(c5615.07,13490.07) OLED.1@5590.27,13465.27 ; J2.4@5608.27,10984.92 5370.12,11223.07 5370.12,11480.12 U2.18@5824.45,11934.45 ; ADC.4@3444.11,11645.45 cw(c3402.24,11603.58) 3461.46,11603.58 ; ADC.4@3444.11,11645.45 cw(c3402.24,11603.58) 3461.46,11603.58 ; ADC.4@3444.11,11645.45 cw(c3402.24,11603.58) 3461.46,11603.58 ; ADC.4@3444.11,11645.45 cw(c3402.24,11603.58) 3461.46,11603.58 ; ADC.4@3444.11,11645.45 cw(c3402.24,11603.58) 3461.46,11603.58 ; ADC.4@3444.11,11645.45 cw(c3402.24,11603.58) 3461.46,11603.58 ; ADC.4@3451.18,11652.52 cw(c3426.38,11627.72) 3461.46,11627.72 ; ADC.4@3451.18,11652.52 cw(c3426.38,11627.72) 3461.46,11627.72 ; ADC.4@3451.18,11652.52 cw(c3426.38,11627.72) 3461.46,11627.72 ; ADC.4@3451.18,11652.52 cw(c3426.38,11627.72) 3461.46,11627.72 ; ADC.4@3451.18,11652.52 cw(c3426.38,11627.72) 3461.46,11627.72 ; ADC.4@3451.18,11652.52 cw(c3426.38,11627.72) 3461.46,11627.72 ; 3461.46,11603.58 cw(c3520.67,11603.58) ADC.4@3478.8,11645.45 ; 3461.46,11603.58 cw(c3520.67,11603.58) ADC.4@3478.8,11645.45 ; 3461.46,11603.58 cw(c3520.67,11603.58) ADC.4@3478.8,11645.45 ; 3461.46,11603.58 cw(c3520.67,11603.58) ADC.4@3478.8,11645.45 ; 3461.46,11603.58 cw(c3520.67,11603.58) ADC.4@3478.8,11645.45 ; 3461.46,11603.58 cw(c3520.67,11603.58) ADC.4@3478.8,11645.45 ; 3461.46,11627.72 cw(c3496.53,11627.72) ADC.4@3471.73,11652.52 ; 3461.46,11627.72 cw(c3496.53,11627.72) ADC.4@3471.73,11652.52 ; 3461.46,11627.72 cw(c3496.53,11627.72) ADC.4@3471.73,11652.52 ; 3461.46,11627.72 cw(c3496.53,11627.72) ADC.4@3471.73,11652.52 ; 3461.46,11627.72 cw(c3496.53,11627.72) ADC.4@3471.73,11652.52 ; 3461.46,11627.72 cw(c3496.53,11627.72) ADC.4@3471.73,11652.52 ; 3749.7,10984.92 cw(c3749.7,10901.94) J1.4@3808.37,10960.62 ; 3749.7,10984.92 ccw(c3749.7,11067.9) J1.4@3808.37,11009.22 ; 3749.7,10984.92 ccw(c3749.7,11067.9) J1.4@3808.37,11009.22 ; 3749.7,10984.92 cw(c3749.7,10901.94) J1.4@3808.37,10960.62 ; 3749.7,10984.92 ccw(c3749.7,11067.9) J1.4@3808.37,11009.22 ; 3749.7,10984.92 cw(c3749.7,10901.94) J1.4@3808.37,10960.62 ; 3749.7,10984.92 ccw(c3749.7,11067.9) J1.4@3808.37,11009.22 ; 3749.7,10984.92 cw(c3749.7,10901.94) J1.4@3808.37,10960.62 ; 3749.7,10984.92 ccw(c3749.7,11067.9) J1.4@3808.37,11009.22 ; 3749.7,10984.92 cw(c3749.7,10901.94) J1.4@3808.37,10960.62 ; 3749.7,10984.92 ccw(c3749.7,11067.9) J1.4@3808.37,11009.22 ; 3749.7,10984.92 cw(c3749.7,10901.94) J1.4@3808.37,10960.62 ; 3773.84,10984.92 cw(c3773.84,10926.09) J1.4@3815.44,10967.69 ; 3773.84,10984.92 ccw(c3773.84,11043.76) J1.4@3815.44,11002.15 ; 3773.84,10984.92 ccw(c3773.84,11043.76) J1.4@3815.44,11002.15 ; 3773.84,10984.92 cw(c3773.84,10926.09) J1.4@3815.44,10967.69 ; 3773.84,10984.92 ccw(c3773.84,11043.76) J1.4@3815.44,11002.15 ; 3773.84,10984.92 cw(c3773.84,10926.09) J1.4@3815.44,10967.69 ; 3773.84,10984.92 ccw(c3773.84,11043.76) J1.4@3815.44,11002.15 ; 3773.84,10984.92 cw(c3773.84,10926.09) J1.4@3815.44,10967.69 ; 3773.84,10984.92 ccw(c3773.84,11043.76) J1.4@3815.44,11002.15 ; 3773.84,10984.92 cw(c3773.84,10926.09) J1.4@3815.44,10967.69 ; 3773.84,10984.92 ccw(c3773.84,11043.76) J1.4@3815.44,11002.15 ; 3773.84,10984.92 cw(c3773.84,10926.09) J1.4@3815.44,10967.69 ; U1.1@4107.11,12551.79 ccw(c4065.23,12593.66) 4124.45,12593.66 ; U1.1@4107.11,12551.79 ccw(c4065.23,12593.66) 4124.45,12593.66 ; U1.1@4107.11,12551.79 ccw(c4065.23,12593.66) 4124.45,12593.66 ; U1.1@4107.11,12551.79 ccw(c4065.23,12593.66) 4124.45,12593.66 ; U1.1@4107.11,12551.79 ccw(c4065.23,12593.66) 4124.45,12593.66 ; U1.1@4107.11,12551.79 ccw(c4065.23,12593.66) 4124.45,12593.66 ; U1.1@4114.18,12544.72 ccw(c4089.38,12569.52) 4124.45,12569.52 ; U1.1@4114.18,12544.72 ccw(c4089.38,12569.52) 4124.45,12569.52 ; U1.1@4114.18,12544.72 ccw(c4089.38,12569.52) 4124.45,12569.52 ; U1.1@4114.18,12544.72 ccw(c4089.38,12569.52) 4124.45,12569.52 ; U1.1@4114.18,12544.72 ccw(c4089.38,12569.52) 4124.45,12569.52 ; U1.1@4114.18,12544.72 ccw(c4089.38,12569.52) 4124.45,12569.52 ; 4124.45,12569.52 ccw(c4159.52,12569.52) U1.1@4134.72,12544.72 ; 4124.45,12569.52 ccw(c4159.52,12569.52) U1.1@4134.72,12544.72 ; 4124.45,12569.52 ccw(c4159.52,12569.52) U1.1@4134.72,12544.72 ; 4124.45,12569.52 ccw(c4159.52,12569.52) U1.1@4134.72,12544.72 ; 4124.45,12569.52 ccw(c4159.52,12569.52) U1.1@4134.72,12544.72 ; 4124.45,12569.52 ccw(c4159.52,12569.52) U1.1@4134.72,12544.72 ; 4124.45,12593.66 ccw(c4183.66,12593.66) U1.1@4141.79,12551.79 ; 4124.45,12593.66 ccw(c4183.66,12593.66) U1.1@4141.79,12551.79 ; 4124.45,12593.66 ccw(c4183.66,12593.66) U1.1@4141.79,12551.79 ; 4124.45,12593.66 ccw(c4183.66,12593.66) U1.1@4141.79,12551.79 ; 4124.45,12593.66 ccw(c4183.66,12593.66) U1.1@4141.79,12551.79 ; 4124.45,12593.66 ccw(c4183.66,12593.66) U1.1@4141.79,12551.79 ; 4657.36,13691.93 cw(c4657.36,13632.71) NRF24L01.2@4699.23,13674.59 ; 4657.36,13691.93 ccw(c4657.36,13751.14) NRF24L01.2@4699.23,13709.27 ; 4657.36,13691.93 ccw(c4657.36,13751.14) NRF24L01.2@4699.23,13709.27 ; 4657.36,13691.93 cw(c4657.36,13632.71) NRF24L01.2@4699.23,13674.59 ; 4657.36,13691.93 ccw(c4657.36,13751.14) NRF24L01.2@4699.23,13709.27 ; 4657.36,13691.93 cw(c4657.36,13632.71) NRF24L01.2@4699.23,13674.59 ; 4657.36,13691.93 ccw(c4657.36,13751.14) NRF24L01.2@4699.23,13709.27 ; 4657.36,13691.93 cw(c4657.36,13632.71) NRF24L01.2@4699.23,13674.59 ; 4657.36,13691.93 ccw(c4657.36,13751.14) NRF24L01.2@4699.23,13709.27 ; 4657.36,13691.93 cw(c4657.36,13632.71) NRF24L01.2@4699.23,13674.59 ; 4657.36,13691.93 ccw(c4657.36,13751.14) NRF24L01.2@4699.23,13709.27 ; 4657.36,13691.93 cw(c4657.36,13632.71) NRF24L01.2@4699.23,13674.59 ; 4681.5,13691.93 cw(c4681.5,13656.86) NRF24L01.2@4706.3,13681.66 ; 4681.5,13691.93 ccw(c4681.5,13727) NRF24L01.2@4706.3,13702.2 ; 4681.5,13691.93 ccw(c4681.5,13727) NRF24L01.2@4706.3,13702.2 ; 4681.5,13691.93 cw(c4681.5,13656.86) NRF24L01.2@4706.3,13681.66 ; 4681.5,13691.93 ccw(c4681.5,13727) NRF24L01.2@4706.3,13702.2 ; 4681.5,13691.93 cw(c4681.5,13656.86) NRF24L01.2@4706.3,13681.66 ; 4681.5,13691.93 ccw(c4681.5,13727) NRF24L01.2@4706.3,13702.2 ; 4681.5,13691.93 cw(c4681.5,13656.86) NRF24L01.2@4706.3,13681.66 ; 4681.5,13691.93 ccw(c4681.5,13727) NRF24L01.2@4706.3,13702.2 ; 4681.5,13691.93 cw(c4681.5,13656.86) NRF24L01.2@4706.3,13681.66 ; 4681.5,13691.93 ccw(c4681.5,13727) NRF24L01.2@4706.3,13702.2 ; 4681.5,13691.93 cw(c4681.5,13656.86) NRF24L01.2@4706.3,13681.66 ; NRF24L01.2@4699.23,13709.27 ccw(c4657.36,13751.14) 4716.57,13751.14 ; NRF24L01.2@4699.23,13709.27 ccw(c4657.36,13751.14) 4716.57,13751.14 ; NRF24L01.2@4699.23,13709.27 ccw(c4657.36,13751.14) 4716.57,13751.14 ; NRF24L01.2@4699.23,13709.27 ccw(c4657.36,13751.14) 4716.57,13751.14 ; NRF24L01.2@4699.23,13709.27 ccw(c4657.36,13751.14) 4716.57,13751.14 ; NRF24L01.2@4699.23,13709.27 ccw(c4657.36,13751.14) 4716.57,13751.14 ; NRF24L01.2@4706.3,13702.2 ccw(c4681.5,13727) 4716.57,13727 ; NRF24L01.2@4706.3,13702.2 ccw(c4681.5,13727) 4716.57,13727 ; NRF24L01.2@4706.3,13702.2 ccw(c4681.5,13727) 4716.57,13727 ; NRF24L01.2@4706.3,13702.2 ccw(c4681.5,13727) 4716.57,13727 ; NRF24L01.2@4706.3,13702.2 ccw(c4681.5,13727) 4716.57,13727 ; NRF24L01.2@4706.3,13702.2 ccw(c4681.5,13727) 4716.57,13727 ; 4716.57,13727 ccw(c4751.65,13727) NRF24L01.2@4726.85,13702.2 ; 4716.57,13727 ccw(c4751.65,13727) NRF24L01.2@4726.85,13702.2 ; 4716.57,13727 ccw(c4751.65,13727) NRF24L01.2@4726.85,13702.2 ; 4716.57,13727 ccw(c4751.65,13727) NRF24L01.2@4726.85,13702.2 ; 4716.57,13727 ccw(c4751.65,13727) NRF24L01.2@4726.85,13702.2 ; 4716.57,13727 ccw(c4751.65,13727) NRF24L01.2@4726.85,13702.2 ; 4716.57,13751.14 ccw(c4775.79,13751.14) NRF24L01.2@4733.92,13709.27 ; 4716.57,13751.14 ccw(c4775.79,13751.14) NRF24L01.2@4733.92,13709.27 ; 4716.57,13751.14 ccw(c4775.79,13751.14) NRF24L01.2@4733.92,13709.27 ; 4716.57,13751.14 ccw(c4775.79,13751.14) NRF24L01.2@4733.92,13709.27 ; 4716.57,13751.14 ccw(c4775.79,13751.14) NRF24L01.2@4733.92,13709.27 ; 4716.57,13751.14 ccw(c4775.79,13751.14) NRF24L01.2@4733.92,13709.27 ; 5549.59,11043.59 cw(c5490.92,10984.92) J2.4@5573.9,10984.92 ; 5549.59,11043.59 ccw(c5608.27,11102.27) J2.4@5608.27,11019.29 ; 5549.59,11043.59 ccw(c5608.27,11102.27) J2.4@5608.27,11019.29 ; 5549.59,11043.59 cw(c5490.92,10984.92) J2.4@5573.9,10984.92 ; 5549.59,11043.59 ccw(c5608.27,11102.27) J2.4@5608.27,11019.29 ; 5549.59,11043.59 cw(c5490.92,10984.92) J2.4@5573.9,10984.92 ; 5549.59,11043.59 ccw(c5608.27,11102.27) J2.4@5608.27,11019.29 ; 5549.59,11043.59 cw(c5490.92,10984.92) J2.4@5573.9,10984.92 ; 5549.59,11043.59 ccw(c5608.27,11102.27) J2.4@5608.27,11019.29 ; 5549.59,11043.59 cw(c5490.92,10984.92) J2.4@5573.9,10984.92 ; 5549.59,11043.59 ccw(c5608.27,11102.27) J2.4@5608.27,11019.29 ; 5549.59,11043.59 cw(c5490.92,10984.92) J2.4@5573.9,10984.92 ; 5564.65,11019.42 ccw(c5618.28,11033.79) J2.4@5607.14,10979.41 ; 5564.65,11019.42 ccw(c5618.28,11033.79) J2.4@5607.14,10979.41 ; 5564.65,11019.42 ccw(c5618.28,11033.79) J2.4@5607.14,10979.41 ; 5564.65,11019.42 ccw(c5618.28,11033.79) J2.4@5607.14,10979.41 ; 5564.65,11019.42 ccw(c5618.28,11033.79) J2.4@5607.14,10979.41 ; 5564.65,11019.42 ccw(c5618.28,11033.79) J2.4@5607.14,10979.41 ; 5564.65,11019.42 ccw(c5618.28,11033.79) J2.4@5607.14,10979.41 ; 5564.65,11019.42 ccw(c5618.28,11033.79) J2.4@5607.14,10979.41 ; 5564.65,11019.42 ccw(c5618.28,11033.79) J2.4@5607.14,10979.41 ; 5564.65,11019.42 ccw(c5618.28,11033.79) J2.4@5607.14,10979.41 ; 5564.65,11019.42 ccw(c5618.28,11033.79) J2.4@5607.14,10979.41 ; 5564.65,11019.42 ccw(c5618.28,11033.79) J2.4@5607.14,10979.41 ; 5564.65,11019.42 ccw(c5618.28,11033.79) J2.4@5607.14,10979.41 ; 5564.65,11019.42 ccw(c5618.28,11033.79) J2.4@5607.14,10979.41 ; 5564.65,11019.42 ccw(c5618.28,11033.79) J2.4@5607.14,10979.41 ; 5566.67,11026.52 cw(c5525.06,10984.92) J2.4@5583.9,10984.92 ; 5566.67,11026.52 ccw(c5608.27,11068.13) J2.4@5608.27,11009.29 ; 5566.67,11026.52 ccw(c5608.27,11068.13) J2.4@5608.27,11009.29 ; 5566.67,11026.52 cw(c5525.06,10984.92) J2.4@5583.9,10984.92 ; 5566.67,11026.52 ccw(c5608.27,11068.13) J2.4@5608.27,11009.29 ; 5566.67,11026.52 cw(c5525.06,10984.92) J2.4@5583.9,10984.92 ; 5566.67,11026.52 ccw(c5608.27,11068.13) J2.4@5608.27,11009.29 ; 5566.67,11026.52 cw(c5525.06,10984.92) J2.4@5583.9,10984.92 ; 5566.67,11026.52 ccw(c5608.27,11068.13) J2.4@5608.27,11009.29 ; 5566.67,11026.52 cw(c5525.06,10984.92) J2.4@5583.9,10984.92 ; 5566.67,11026.52 ccw(c5608.27,11068.13) J2.4@5608.27,11009.29 ; 5566.67,11026.52 cw(c5525.06,10984.92) J2.4@5583.9,10984.92 ; 5568.84,11003.79 ccw(c5614.65,11016.06) J2.4@5605.13,10969.61 ; 5568.84,11003.79 ccw(c5614.65,11016.06) J2.4@5605.13,10969.61 ; 5568.84,11003.79 ccw(c5614.65,11016.06) J2.4@5605.13,10969.61 ; 5568.84,11003.79 ccw(c5614.65,11016.06) J2.4@5605.13,10969.61 ; 5568.84,11003.79 ccw(c5614.65,11016.06) J2.4@5605.13,10969.61 ; 5568.84,11003.79 ccw(c5614.65,11016.06) J2.4@5605.13,10969.61 ; 5568.84,11003.79 ccw(c5614.65,11016.06) J2.4@5605.13,10969.61 ; 5568.84,11003.79 ccw(c5614.65,11016.06) J2.4@5605.13,10969.61 ; 5568.84,11003.79 ccw(c5614.65,11016.06) J2.4@5605.13,10969.61 ; 5568.84,11003.79 ccw(c5614.65,11016.06) J2.4@5605.13,10969.61 ; 5568.84,11003.79 ccw(c5614.65,11016.06) J2.4@5605.13,10969.61 ; 5568.84,11003.79 ccw(c5614.65,11016.06) J2.4@5605.13,10969.61 ; 5568.84,11003.79 ccw(c5614.65,11016.06) J2.4@5605.13,10969.61 ; 5568.84,11003.79 ccw(c5614.65,11016.06) J2.4@5605.13,10969.61 ; 5568.84,11003.79 ccw(c5614.65,11016.06) J2.4@5605.13,10969.61 ; 5573.77,11028.54 cw(c5559.4,10974.91) J2.4@5613.78,10986.05 ; 5573.77,11028.54 cw(c5559.4,10974.91) J2.4@5613.78,10986.05 ; 5573.77,11028.54 cw(c5559.4,10974.91) J2.4@5613.78,10986.05 ; 5573.77,11028.54 cw(c5559.4,10974.91) J2.4@5613.78,10986.05 ; 5573.77,11028.54 cw(c5559.4,10974.91) J2.4@5613.78,10986.05 ; 5573.77,11028.54 cw(c5559.4,10974.91) J2.4@5613.78,10986.05 ; 5573.77,11028.54 cw(c5559.4,10974.91) J2.4@5613.78,10986.05 ; 5573.77,11028.54 cw(c5559.4,10974.91) J2.4@5613.78,10986.05 ; 5573.77,11028.54 cw(c5559.4,10974.91) J2.4@5613.78,10986.05 ; 5573.77,11028.54 cw(c5559.4,10974.91) J2.4@5613.78,10986.05 ; 5573.77,11028.54 cw(c5559.4,10974.91) J2.4@5613.78,10986.05 ; 5573.77,11028.54 cw(c5559.4,10974.91) J2.4@5613.78,10986.05 ; 5573.77,11028.54 cw(c5559.4,10974.91) J2.4@5613.78,10986.05 ; 5573.77,11028.54 cw(c5559.4,10974.91) J2.4@5613.78,10986.05 ; 5573.77,11028.54 cw(c5559.4,10974.91) J2.4@5613.78,10986.05 ; 5589.4,11024.35 cw(c5577.12,10978.54) J2.4@5623.58,10988.06 ; 5589.4,11024.35 cw(c5577.12,10978.54) J2.4@5623.58,10988.06 ; 5589.4,11024.35 cw(c5577.12,10978.54) J2.4@5623.58,10988.06 ; 5589.4,11024.35 cw(c5577.12,10978.54) J2.4@5623.58,10988.06 ; 5589.4,11024.35 cw(c5577.12,10978.54) J2.4@5623.58,10988.06 ; 5589.4,11024.35 cw(c5577.12,10978.54) J2.4@5623.58,10988.06 ; 5589.4,11024.35 cw(c5577.12,10978.54) J2.4@5623.58,10988.06 ; 5589.4,11024.35 cw(c5577.12,10978.54) J2.4@5623.58,10988.06 ; 5589.4,11024.35 cw(c5577.12,10978.54) J2.4@5623.58,10988.06 ; 5589.4,11024.35 cw(c5577.12,10978.54) J2.4@5623.58,10988.06 ; 5589.4,11024.35 cw(c5577.12,10978.54) J2.4@5623.58,10988.06 ; 5589.4,11024.35 cw(c5577.12,10978.54) J2.4@5623.58,10988.06 ; 5589.4,11024.35 cw(c5577.12,10978.54) J2.4@5623.58,10988.06 ; 5589.4,11024.35 cw(c5577.12,10978.54) J2.4@5623.58,10988.06 ; 5589.4,11024.35 cw(c5577.12,10978.54) J2.4@5623.58,10988.06 ; 5782.58,11892.58 cw(c5824.45,11850.71) U2.18@5824.45,11909.92 ; 5782.58,11892.58 ccw(c5740.71,11934.45) U2.18@5799.92,11934.45 ; 5782.58,11892.58 ccw(c5740.71,11934.45) U2.18@5799.92,11934.45 ; 5782.58,11892.58 cw(c5824.45,11850.71) U2.18@5824.45,11909.92 ; 5782.58,11892.58 ccw(c5740.71,11934.45) U2.18@5799.92,11934.45 ; 5782.58,11892.58 cw(c5824.45,11850.71) U2.18@5824.45,11909.92 ; 5782.58,11892.58 ccw(c5740.71,11934.45) U2.18@5799.92,11934.45 ; 5782.58,11892.58 cw(c5824.45,11850.71) U2.18@5824.45,11909.92 ; 5782.58,11892.58 ccw(c5740.71,11934.45) U2.18@5799.92,11934.45 ; 5782.58,11892.58 cw(c5824.45,11850.71) U2.18@5824.45,11909.92 ; 5782.58,11892.58 ccw(c5740.71,11934.45) U2.18@5799.92,11934.45 ; 5782.58,11892.58 cw(c5824.45,11850.71) U2.18@5824.45,11909.92 ; 5793.93,11912.1 cw(c5831.06,11902.15) U2.18@5823.35,11939.81 ; 5793.93,11912.1 cw(c5831.06,11902.15) U2.18@5823.35,11939.81 ; 5793.93,11912.1 cw(c5831.06,11902.15) U2.18@5823.35,11939.81 ; 5793.93,11912.1 cw(c5831.06,11902.15) U2.18@5823.35,11939.81 ; 5793.93,11912.1 cw(c5831.06,11902.15) U2.18@5823.35,11939.81 ; 5793.93,11912.1 cw(c5831.06,11902.15) U2.18@5823.35,11939.81 ; 5793.93,11912.1 cw(c5831.06,11902.15) U2.18@5823.35,11939.81 ; 5793.93,11912.1 cw(c5831.06,11902.15) U2.18@5823.35,11939.81 ; 5793.93,11912.1 cw(c5831.06,11902.15) U2.18@5823.35,11939.81 ; 5793.93,11912.1 cw(c5831.06,11902.15) U2.18@5823.35,11939.81 ; 5793.93,11912.1 cw(c5831.06,11902.15) U2.18@5823.35,11939.81 ; 5793.93,11912.1 cw(c5831.06,11902.15) U2.18@5823.35,11939.81 ; 5793.93,11912.1 cw(c5831.06,11902.15) U2.18@5823.35,11939.81 ; 5793.93,11912.1 cw(c5831.06,11902.15) U2.18@5823.35,11939.81 ; 5793.93,11912.1 cw(c5831.06,11902.15) U2.18@5823.35,11939.81 ; 5799.65,11909.65 cw(c5824.45,11884.85) U2.18@5824.45,11919.92 ; 5799.65,11909.65 ccw(c5774.85,11934.45) U2.18@5809.92,11934.45 ; 5799.65,11909.65 ccw(c5774.85,11934.45) U2.18@5809.92,11934.45 ; 5799.65,11909.65 cw(c5824.45,11884.85) U2.18@5824.45,11919.92 ; 5799.65,11909.65 ccw(c5774.85,11934.45) U2.18@5809.92,11934.45 ; 5799.65,11909.65 cw(c5824.45,11884.85) U2.18@5824.45,11919.92 ; 5799.65,11909.65 ccw(c5774.85,11934.45) U2.18@5809.92,11934.45 ; 5799.65,11909.65 cw(c5824.45,11884.85) U2.18@5824.45,11919.92 ; 5799.65,11909.65 ccw(c5774.85,11934.45) U2.18@5809.92,11934.45 ; 5799.65,11909.65 cw(c5824.45,11884.85) U2.18@5824.45,11919.92 ; 5799.65,11909.65 ccw(c5774.85,11934.45) U2.18@5809.92,11934.45 ; 5799.65,11909.65 cw(c5824.45,11884.85) U2.18@5824.45,11919.92 ; 5802.1,11903.93 ccw(c5792.15,11941.06) U2.18@5829.81,11933.35 ; 5802.1,11903.93 ccw(c5792.15,11941.06) U2.18@5829.81,11933.35 ; 5802.1,11903.93 ccw(c5792.15,11941.06) U2.18@5829.81,11933.35 ; 5802.1,11903.93 ccw(c5792.15,11941.06) U2.18@5829.81,11933.35 ; 5802.1,11903.93 ccw(c5792.15,11941.06) U2.18@5829.81,11933.35 ; 5802.1,11903.93 ccw(c5792.15,11941.06) U2.18@5829.81,11933.35 ; 5802.1,11903.93 ccw(c5792.15,11941.06) U2.18@5829.81,11933.35 ; 5802.1,11903.93 ccw(c5792.15,11941.06) U2.18@5829.81,11933.35 ; 5802.1,11903.93 ccw(c5792.15,11941.06) U2.18@5829.81,11933.35 ; 5802.1,11903.93 ccw(c5792.15,11941.06) U2.18@5829.81,11933.35 ; 5802.1,11903.93 ccw(c5792.15,11941.06) U2.18@5829.81,11933.35 ; 5802.1,11903.93 ccw(c5792.15,11941.06) U2.18@5829.81,11933.35 ; 5802.1,11903.93 ccw(c5792.15,11941.06) U2.18@5829.81,11933.35 ; 5802.1,11903.93 ccw(c5792.15,11941.06) U2.18@5829.81,11933.35 ; 5802.1,11903.93 ccw(c5792.15,11941.06) U2.18@5829.81,11933.35